# EAGLE board pwm (EAGLE 7.1.0)
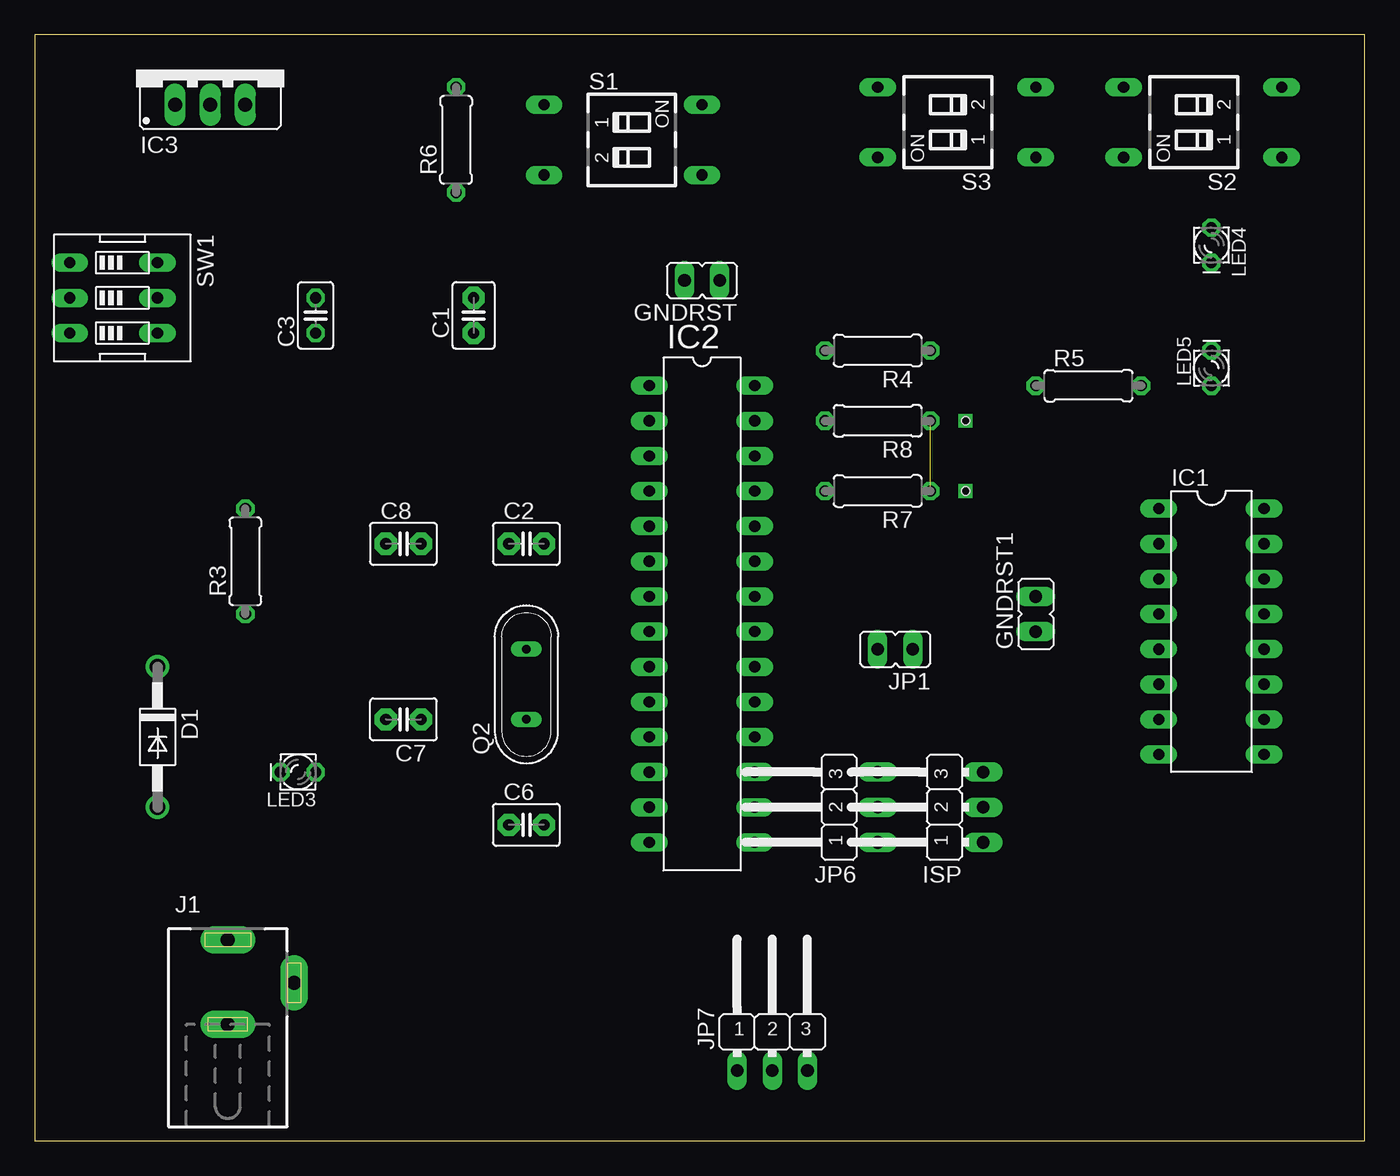
[diagram p0: board, top side]
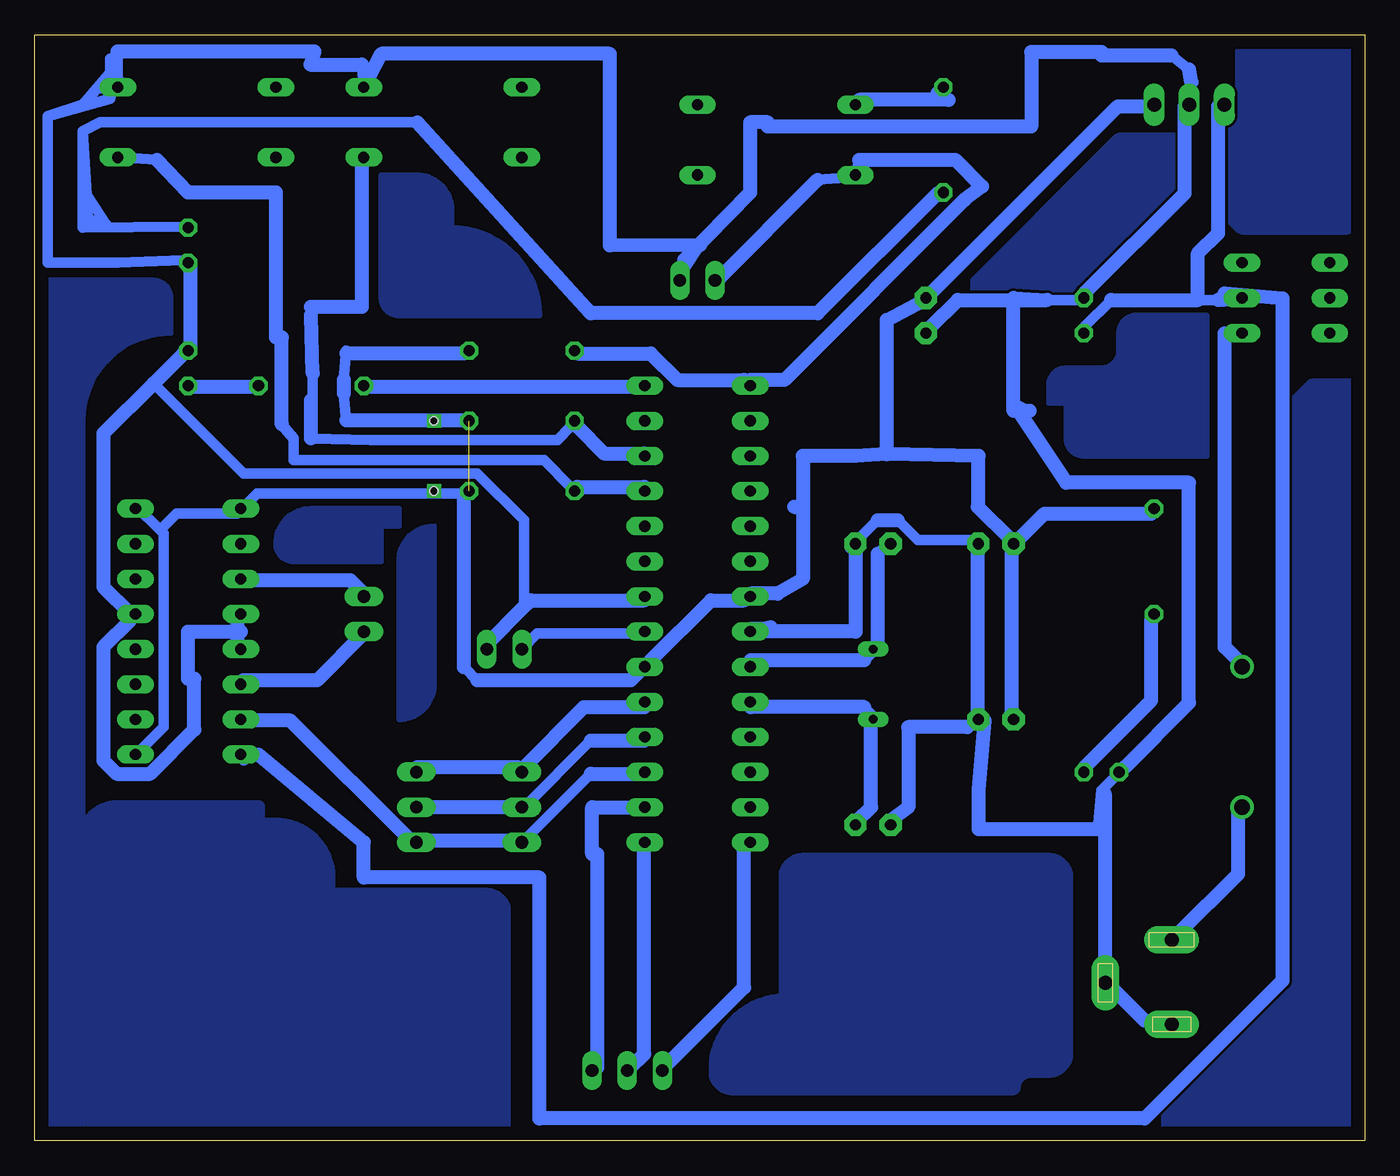
[diagram p1: board, bottom side, seen from below]

Size 96.19 x 80 mm. Coordinates in mm from the lower left corner, seen from the top.
Outline: 0,0 96.19,0 96.19,80 0,80 0,0
Copper layers (1*16): Top 0.035mm / dielectric 1.5mm / Bottom 0.035mm
Design rules "default *": minimum track width 30mil, minimum drill 24mil, track to track 8mil, track to pad 8mil, pad to pad 8mil, via to via 8mil, smd to smd 8mil, copper to edge 40mil, drill to drill 8mil, minimum pad ring 10mil, minimum via ring 8mil, stop-mask expansion 4mil, vias tented up to drill 0mil, thermal gap 10mil
Holes 0.6 mm at 67.31,52.07 67.31,46.99

## Footprints (pad centres in the part's own frame; a part is rotated, then mirrored left to right if it is on the bottom)
C2.5-3 = drill 0.813 pad 1.6 octagon: 1 -1.27,0; 2 1.27,0
C025-025X050 = drill 0.813 octagon: 1 -1.27,0; 2 1.27,0
DO41-10 = drill 1.118: A 5.08,0; C -5.08,0
JP1 = drill 0.914 long: 1 0,-1.27; 2 0,1.27
DIL16 = drill 0.813 long: 1 -8.89,-3.81; 2 -6.35,-3.81; 3 -3.81,-3.81; 4 -1.27,-3.81; 5 1.27,-3.81; 6 3.81,-3.81; 7 6.35,-3.81; 8 8.89,-3.81; 9 8.89,3.81; 10 6.35,3.81; 11 3.81,3.81; 12 1.27,3.81; 13 -1.27,3.81; 14 -3.81,3.81; 15 -6.35,3.81; 16 -8.89,3.81
DIL28-3 = drill 0.813 long: 1 -16.51,-3.81; 2 -13.97,-3.81; 3 -11.43,-3.81; 4 -8.89,-3.81; 5 -6.35,-3.81; 6 -3.81,-3.81; 7 -1.27,-3.81; 8 1.27,-3.81; 9 3.81,-3.81; 10 6.35,-3.81; 11 8.89,-3.81; 12 11.43,-3.81; 13 13.97,-3.81; 14 16.51,-3.81; 15 16.51,3.81; 16 13.97,3.81; 17 11.43,3.81; 18 8.89,3.81; 19 6.35,3.81; 20 3.81,3.81; 21 1.27,3.81; 22 -1.27,3.81; 23 -3.81,3.81; 24 -6.35,3.81; 25 -8.89,3.81; 26 -11.43,3.81; 27 -13.97,3.81; 28 -16.51,3.81
78XXS = drill 1.016 long: GND 0,-2.54; IN -2.54,-2.54; OUT 2.54,-2.54
JP2W = drill 0.914 long: 1 -2.54,-1.27; 2 0,-1.27; 3 2.54,-1.27
DCJ0202 = drill 1 pad 2 long: 1 0,3.1; 2 4.8,0; 3 0,-3
LED_LD260 = drill 0.813 octagon: A -1.27,0; K 1.27,0
QS = drill 0.61 long: 1 -2.54,0; 2 2.54,0
0207/7 = drill 0.813 octagon: 1 -3.81,0; 2 3.81,0
SD4-02 = drill 0.813 long: 1 -2.54,-6.35; 2 2.54,-6.35; 3 2.54,5.08; 4 -2.54,5.08
EDG-03 = drill 0.813 long: 1 -2.54,-3.81; 2 0,-3.81; 3 2.54,-3.81; 4 2.54,2.54; 5 0,2.54; 6 -2.54,2.54

## Placement (x,y rotation side)
C1  0.1uf  [C2.5-3]  31.75,59.69 90 top
C2  22pf  [C2.5-3]  35.56,43.18 0 top
C3  100uf  [C025-025X050]  20.32,59.69 90 top
C6  22pf  [C2.5-3]  35.56,22.86 0 top
C7  0.1uf  [C2.5-3]  26.67,30.48 180 top
C8  0.1uf  [C2.5-3]  26.67,43.18 0 top
D1  1N4004  [DO41-10]  8.89,29.21 270 top
GNDRST  [JP1]  48.26,62.23 90 top
GNDRST1  [JP1]  72.39,38.1 0 top
IC1  L293D  [DIL16]  85.09,36.83 270 top
IC2  MEGA8-P  [DIL28-3]  48.26,38.1 270 top
IC3  [78XXS]  12.7,77.47 0 top
ISP  [JP2W]  67.31,24.13 90 top
J1  DCJ0202  [DCJ0202]  13.97,11.43 0 top
JP1  [JP1]  62.23,35.56 90 top
JP6  [JP2W]  59.69,24.13 90 top
JP7  [JP2W]  53.34,6.35 0 top
LED3  [LED_LD260]  19.05,26.67 180 top
LED4  [LED_LD260]  85.09,64.77 270 top
LED5  [LED_LD260]  85.09,55.88 90 top
Q2  [QS]  35.56,33.02 90 top
R3  330R  [0207/7]  15.24,41.91 90 top
R4  10K  [0207/7]  60.96,57.15 180 top
R5  [0207/7]  76.2,54.61 0 top
R6  330R  [0207/7]  30.48,72.39 90 top
R7  10K  [0207/7]  60.96,46.99 180 top
R8  10K  [0207/7]  60.96,52.07 180 top
S1  [SD4-02]  43.18,72.39 270 top
S2  [SD4-02]  83.82,73.66 90 top
S3  [SD4-02]  66.04,73.66 90 top
SW1  [EDG-03]  6.35,60.96 270 top

## Library data of the parts
C1 C2 C6-C8 = capacitor-wima
C3 = resistor
D1 = diode
GNDRST GNDRST1 ISP JP1 JP6 JP7 = jumper
IC1 = st-microelectronics; MPN: L293D; OC_FARNELL: 9589619; OC_NEWARK: 56P8249
IC2 = atmel; OC_FARNELL: unknown; OC_NEWARK: unknown
IC3 = v-reg
J1 = con-jack; OC_FARNELL: unknown; OC_NEWARK: unknown
LED3-LED5 = eagle-ltspice; SPICEMODEL: NONE; SPICEPREFIX: D; SPICETYPE: diode
Q2 SW1 = special
R3-R8 = rcl
S1-S3 = switch-dil; OC_FARNELL: unknown; OC_NEWARK: unknown

## Nets
GND4: IC1.12
N$1: C3.1 IC1.8 IC3.IN SW1.5
N$3: D1.A J1.1
N$4: IC1.2
N$5: GNDRST1.2 IC1.3
N$6: GNDRST1.1 IC1.6
N$10: C1.1 C2.2 C3.2 C6.1 C7.1 C8.2 GNDRST.1 IC1.4 IC1.5 IC1.13 IC2.8 IC2.22 IC3.GND J1.2 J1.3 JP1.1 LED3.K LED4.K LED5.K S2.2 S3.2
N$15: D1.C SW1.4
N$17: LED3.A R3.1
N$19: C2.1 IC2.9 Q2.2
N$20: C6.2 IC2.10 Q2.1
N$21: C1.2 C7.2 C8.1 IC1.1 IC1.9 IC1.16 IC2.7 IC2.20 IC3.OUT R3.2 R4.1 R7.1 R8.1
N$22: LED4.A R6.1
N$25: IC2.25 R7.2 S2.1
N$26: IC2.26 R8.2 S3.1
N$28: IC2.28 R5.1
N$34: IC2.14 JP7.1
N$35: IC2.15 JP7.2
N$36: IC2.16 JP7.3
N$37: IC1.7 IC2.17 ISP.1 JP6.1
N$38: IC2.18 ISP.2 JP6.2
N$39: IC2.19 ISP.3 JP6.3
N$40: LED5.A R5.2
N$41: R6.2 S1.1
N$42: GNDRST.2 IC2.1 R4.2 S1.2
N$46: IC2.21 JP1.2

## Tracks (layer width: path | path; a pad name or v marks a point on that pad's centre or on a via)
N$1
  Bottom 0.762: 12.06,60.81 10.62,60.81 | 18.34,60.81 20.27,58.88 C3.1 | 80.01,27.94 IC1.8 81.08,27.51 | 10.13,61.29 SW1.5 | 10.62,74.8 IC3.IN
  Bottom 1.016: 18.34,60.81 12.06,60.81 12.06,64.19 10.62,65.63 10.62,74.8 | 10.62,60.81 SW1.5 | 80.01,27.94 72.39,21.59 72.39,19.05 59.69,19.05 59.69,1.63 15.93,1.63 5.97,11.58 5.97,60.94 10.13,61.29
N$2  (via drill 0.6)
  other vias: 67.31,52.07
N$3
  Bottom 0.762: 9.17,24.13 D1.A | 13.51,14.96 J1.1
  Bottom 1.016: 9.17,24.13 9.17,19.3 13.51,14.96
N$5
  Bottom 0.762: 81.08,40.54 IC1.3 | 72.39,39.57 GNDRST1.2
  Bottom 1.016: 81.08,40.54 73.36,40.54 72.39,39.57
N$6
  Bottom 0.762: 81.08,33.3 IC1.6 | 72.39,36.68 GNDRST1.1
  Bottom 1.016: 81.08,33.3 75.77,33.3 72.39,36.68
N$7  (via drill 0.6)
  other vias: 67.31,46.99
N$8
  pour Bottom: 62.23,16.51 arc-90 63.5,17.78 90.17,17.78 arc-90 92.71,15.24 92.71,2.54 arc-90 91.44,1.27 62.23,1.27
N$9
  pour Bottom: 74.93,19.05 arc-90 78.74,22.86 80.01,22.86 80.01,24.13 90.17,24.13 arc-90 92.71,21.59 92.71,17.78 arc-90 88.9,13.97 76.2,13.97 arc-90 74.93,15.24
N$10
  Bottom 0.762: S2.2 90.17,76.56 89.89,76.56 S2.2 | S2.2 90.19,78.79 | 72.52,77.83 S3.2 | 48.06,64.8 49.71,62.26 GNDRST.1 49.23,62.26 49.23,63.7 | 60.33,39.09 60.57,38.85 60.81,39.09 60.81,44.88 64.19,48.26 81.08,48.26 87.59,54.77 | 52.12,39.09 IC2.22 | 63.7,35.71 JP1.1 | 81.56,35.71 IC1.5 81.56,36.5 81.28,36.83 | 81.56,37.64 IC1.4 | 84.94,57.43 LED5.K 85.42,56.95 | 84.94,63.22 LED4.K 85.42,63.7 90.17,63.5 95.25,63.5 95.25,74.09 | 89.28,38.12 IC1.13 89.28,37.64 | 84.63,33.43 85.09,33.43 | 90.17,77.9 90.17,78.26 90.73,78.26 90.73,75.36 | 90.17,77.9 92.71,74.93 | 92.71,74.93 91.64,76.07 S2.2 | 95.25,74.09 92.71,74.93 | 90.17,77.9 90.73,75.36 | 95.25,74.09 90.73,75.36 | 22.99,60.81 20.75,60.81 C3.2 20.27,61.29 | 31.37,58.88 C1.1 | 13.03,74.8 IC3.GND 12.55,76.56 | 42.95,37.16 44.4,37.16 IC2.8 | 37.16,42.95 C2.2 36.68,43.43 35.23,44.88 | 33.78,44.88 32.33,43.43 27.99,43.43 C8.2 27.99,42.95 | 13.99,8.69 J1.3 | 18.34,11.1 J1.2 18.82,11.58 | 19.3,22.55 19.06,25.34 | 19.06,25.34 17.86,26.54 LED3.K 17.37,27.03 | 27.51,30.4 C7.1 | 34.27,23.16 C6.1 | 28.78,29.92 C7.1 | 18.82,25.09 19.06,25.34 | 27.99,30.89 C7.1 | 25.4,53.34 24.26,52.78 | 19.05,78.49 19.05,78.74 | 12.7,77.47 13.97,78.49
  Bottom 1.016: 72.52,77.83 76.25,77.83 75.95,78.79 90.19,78.79 | 48.06,64.8 54.61,64.77 54.61,78.61 71.12,78.61 S3.2 | 60.33,39.09 52.12,39.09 | 63.7,35.71 60.57,38.85 | 81.56,37.64 81.56,36.5 81.56,35.71 | 84.94,63.22 84.94,57.43 | 89.28,38.12 91.21,40.06 91.21,51.16 87.59,54.77 85.42,56.95 | 85.09,33.43 85.09,36.83 81.28,36.83 | 84.63,33.43 84.63,29.74 87.83,26.54 90.25,26.54 91.21,27.51 91.21,35.71 89.28,37.64 | 31.37,58.88 29.44,60.81 22.99,60.81 25.4,60.96 25.4,53.34 | 13.03,74.8 13.03,68.53 20.27,61.29 | 37.16,42.95 36.83,42.95 36.83,36.83 IC2.8 42.95,37.16 | 35.23,44.88 33.78,44.88 | 13.99,8.69 15.93,8.69 18.34,11.1 | 27.51,30.4 27.94,25.4 27.94,22.55 19.3,22.55 | 28.78,29.92 33.02,29.92 33.02,24.13 34.27,23.16 | 18.82,25.09 18.82,11.58 | 27.99,30.89 27.99,42.95 | 24.26,52.78 25.4,52.78 25.4,53.34 | 25.4,53.34 21.59,47.6 12.72,47.6 12.72,31.67 17.37,27.03 | 49.23,63.7 44.45,68.58 44.45,73.66 43.18,73.66 43.18,73.36 24.13,73.36 24.13,78.74 19.05,78.74 | 12.55,76.56 12.7,77.47 | 13.97,78.49 19.05,78.49
N$11
  pour Bottom: 22.86,5.08 arc-90 21.59,6.35 21.59,19.05 arc-90 22.86,20.32 40.64,20.32 arc-90 41.91,19.05 41.91,10.16 arc-90 46.99,5.08 arc-90 45.72,3.81 25.4,3.81 arc90 24.13,5.08
N$12
  pour Bottom: 12.7,72.39 17.78,72.39 29.21,60.96 20.32,60.96 20.32,62.23 12.7,69.85
N$13
  pour Bottom: 0,54.61 3.81,54.61 5.08,53.34 5.08,11.43 6.35,10.16 15.24,1.27 1.27,1.27 0,2.54
N$14
  pour Bottom: 0,78.74 1.27,80.01 7.62,80.01 8.89,78.74 8.89,76.2 10.16,74.93 10.16,67.31 8.89,66.04 1.27,66.04 0,67.31
N$15
  Bottom 0.762: 9.17,34.75 D1.C
  Bottom 1.016: 9.17,34.75 10.13,35.71 10.13,58.4 SW1.4
N$16
  pour Bottom: 11.43,55.88 11.43,59.69 16.51,59.69 arc-90 17.78,58.42 17.78,57.15 arc90 19.05,55.88 21.59,55.88 arc-90 22.86,54.61 22.86,53.34 21.59,53.34 21.59,50.8 arc-90 20.32,49.53 11.43,49.53
N$17
  Bottom 0.762: 15.44,37.64 R3.1 | 20.27,27.03 LED3.A
  Bottom 1.016: 15.44,37.64 15.44,31.85 20.27,27.03
N$18
  pour Bottom: 67.31,44.45 arc-90 69.85,41.91 69.85,30.48 arc-90 67.31,33.02
N$19
  Bottom 0.762: 35.23,42.47 34.75,42.95 C2.1 | 35.23,35.71 Q2.2 35.71,35.23 36.2,34.75 | 44.4,34.75 IC2.9
  Bottom 1.016: 35.23,42.47 35.23,35.71 | 36.2,34.75 44.4,34.75
N$20
  Bottom 0.762: 36.68,23.16 C6.2 | 36.2,31.37 35.71,30.89 Q2.1 | 44.4,31.37 IC2.10
  Bottom 1.016: 36.68,23.16 35.71,24.13 35.71,30.4 Q2.1 | 36.2,31.37 44.4,31.37
N$21  (1 unrouted)
  Bottom 0.762: 87.11,44.16 88.8,45.85 IC1.16 | 87.11,44.16 86.87,43.92 86.87,29.92 88.8,27.99 IC1.9 | 87.11,44.16 85.9,45.36 81.56,45.36 IC1.1 81.08,45.85 80.11,46.81 65.15,46.81 R7.1 | 15.44,74.8 IC3.OUT | 31.37,61.29 C1.2 31.85,60.81 | 44.88,39.09 IC2.7 44.4,39.57 | 51.64,34.75 IC2.20 52.12,34.27 | 15.44,45.36 R3.2 | 25.09,43.43 C8.1 | 25.58,30.89 C7.2 | 25.58,42.95 C8.1 | 27.99,45.85 27.94,45.85 | 25.58,43.43 C8.1 | 64.19,33.3 65.15,34.27 | 73.84,54.05 73.66,52.07 73.66,52.12 | 73.66,56.95 73.66,57.15 73.84,55.02 | 65.15,52.12 R8.1 | 65.15,56.95 R4.1
  Bottom 1.016: 15.44,74.8 17.86,74.8 31.37,61.29 | 44.88,39.09 47.3,39.09 51.64,34.75 | 15.44,45.36 23.16,45.36 25.09,43.43 | 25.58,42.95 25.58,30.89 | 44.4,39.57 42.47,39.57 40.64,40.64 40.64,45.85 | 41.27,45.85 40.64,45.85 | 27.94,45.85 27.94,49.53 34.57,49.66 | 34.57,49.66 36.83,49.53 40.64,49.53 40.64,45.85 | 25.58,43.43 27.99,45.85 | 31.85,60.81 34.57,59.36 34.57,49.66 | 65.15,34.27 65.15,46.81 | 64.19,33.3 53.09,33.3 52.12,34.27 | 73.66,52.12 65.15,52.12 | 73.84,55.02 73.84,54.05 | 65.15,56.95 73.66,56.95
N$22
  Bottom 0.762: 92.71,73 92.3,66.65 91.03,66.34 92.71,68.89 | 92.71,68.89 92.71,66.04 85.42,66.12 LED4.A | 92.71,73 91.44,73.66 68.53,73.66 | 92.71,73 92.71,68.89 | 30.89,68.53 R6.1
  Bottom 1.016: 68.53,73.66 55.98,59.84 39.57,59.84 30.89,68.53
N$23
  pour Bottom: 69.85,45.72 76.2,45.72 arc-90 78.74,43.18 arc-90 77.47,41.91 71.12,41.91 71.12,44.45 69.85,44.45
N$24
  pour Bottom: 95.25,62.23 87.63,62.23 arc90 86.36,60.96 86.36,59.69 86.36,58.42 arc-90 92.71,52.07 92.71,0 96.52,0 96.52,60.96 arc-90
N$25
  Bottom 0.762: 52.12,47.3 IC2.25 | 56.95,47.3 R7.2 57.43,47.3 59.36,49.23 71.91,49.23 77.47,49.23 77.47,50.8 78.31,51.82 | 78.31,58.09 78.74,58.09 | 87.35,70.94 S2.1
  Bottom 1.016: 56.95,47.3 52.12,47.3 | 78.74,58.09 78.74,68.58 85.09,68.58 87.35,70.94 | 78.31,51.82 78.31,58.09
N$26
  Bottom 0.762: 52.12,49.71 IC2.26 | 56.95,51.64 R8.2 57.43,51.64 58.4,50.67 71.91,50.67 76.2,50.8 | 76.2,59.69 76.2,60.33 | 76.07,55.5 76.07,53.57 76.2,53.57 | 72.52,70.94 S3.1
  Bottom 1.016: 52.12,49.71 55.02,49.71 56.95,51.64 | 72.52,70.94 72.52,60.33 76.2,60.33 | 76.07,55.5 76.2,59.69 | 76.2,50.8 76.2,53.57
N$27
  pour Bottom: 59.69,59.69 69.85,59.69 arc90 71.12,60.96 71.12,69.85 68.58,69.85 arc90 66.04,67.31 66.04,66.04 arc90
N$28
  Bottom 0.762: 52.12,54.53 IC2.28 | 72.39,54.53 R5.1
  Bottom 1.016: 72.39,54.53 52.12,54.53
N$34
  Bottom 0.762: 44.88,21.23 IC2.14 | 50.67,5.31 JP7.1
  Bottom 1.016: 44.88,21.23 44.88,11.1 50.67,5.31
N$35
  Bottom 0.762: 52.12,21.23 IC2.15 | 53.09,5.31 JP7.2
  Bottom 1.016: 52.12,21.23 52.12,6.27 53.09,5.31
N$36
  Bottom 0.762: 55.5,20.75 55.88,20.75 | 52.12,24.13 IC2.16 | 55.5,5.31 JP7.3
  Bottom 1.016: 55.88,20.75 55.88,24.13 52.12,24.13 | 55.5,5.31 55.5,20.75
N$37
  Bottom 0.762: 55.98,26.54 60.81,21.72 JP6.1 61.29,21.72 | 52.12,26.54 IC2.17 | 81.08,30.4 IC1.7 | 69.01,21.72 ISP.1 68.53,21.72
  Bottom 1.016: 55.98,26.54 52.12,26.54 | 81.08,30.4 77.7,30.4 69.01,21.72 | 68.53,21.72 61.29,21.72
N$38
  Bottom 0.762: 55.98,28.96 60.81,24.13 JP6.2 | 52.12,28.96 IC2.18
  Bottom 1.016: 55.98,28.96 52.12,28.96 | JP6.2 ISP.2
N$39
  Bottom 0.762: 52.12,31.37 IC2.19 | 60.81,27.03 JP6.3 61.29,27.03 | 68.53,27.03 ISP.3
  Bottom 1.016: 52.12,31.37 56.46,31.37 60.81,27.03 | 61.29,27.03 68.53,27.03
N$40
  Bottom 0.762: 80.11,54.53 R5.2 | 84.94,54.53 LED5.A
  Bottom 1.016: 84.94,54.53 80.11,54.53
N$41
  Bottom 0.762: 30.89,75.77 30.1,75.29
  Bottom 1.016: 30.1,75.29 36.55,75.29 S1.1 | 30.89,75.77 R6.2
N$42
  Bottom 0.762: 44.88,55.02 IC2.1 44.4,55.02 | 56.95,56.95 R4.2 | 39.57,69.49 37.03,69.67 S1.2 36.55,70.94 | 46.81,62.26 GNDRST.2
  Bottom 1.016: 44.88,55.02 49.71,55.02 51.64,56.95 56.95,56.95 | 46.81,62.26 39.57,69.49 | 44.4,55.02 41.99,55.02 28.96,68.05 27.69,69.01 29.62,70.94 36.55,70.94
N$46
  Bottom 0.762: JP1.2 59.84,36.68 52.12,36.68 IC2.21